# Altium PCB Nguon.PcbDoc
Units mil, origin at the board's own origin, x right, y up, seen from the top; angles counter-clockwise.
Board outline 3720 x 1285 mil, 2 copper layers (Top Layer, Bottom Layer); 7 components, 6 nets, 17 pads, 0 vias.
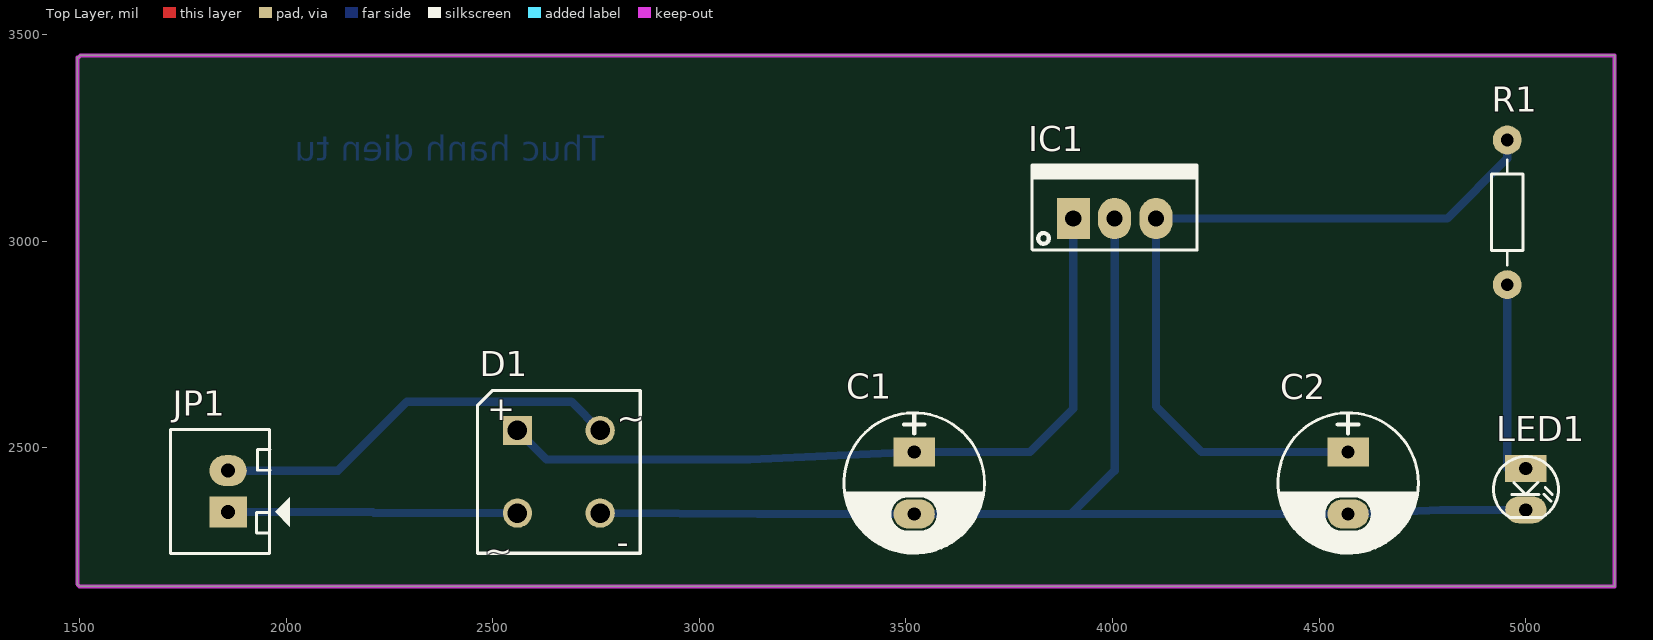
[diagram p0: Top Layer view]
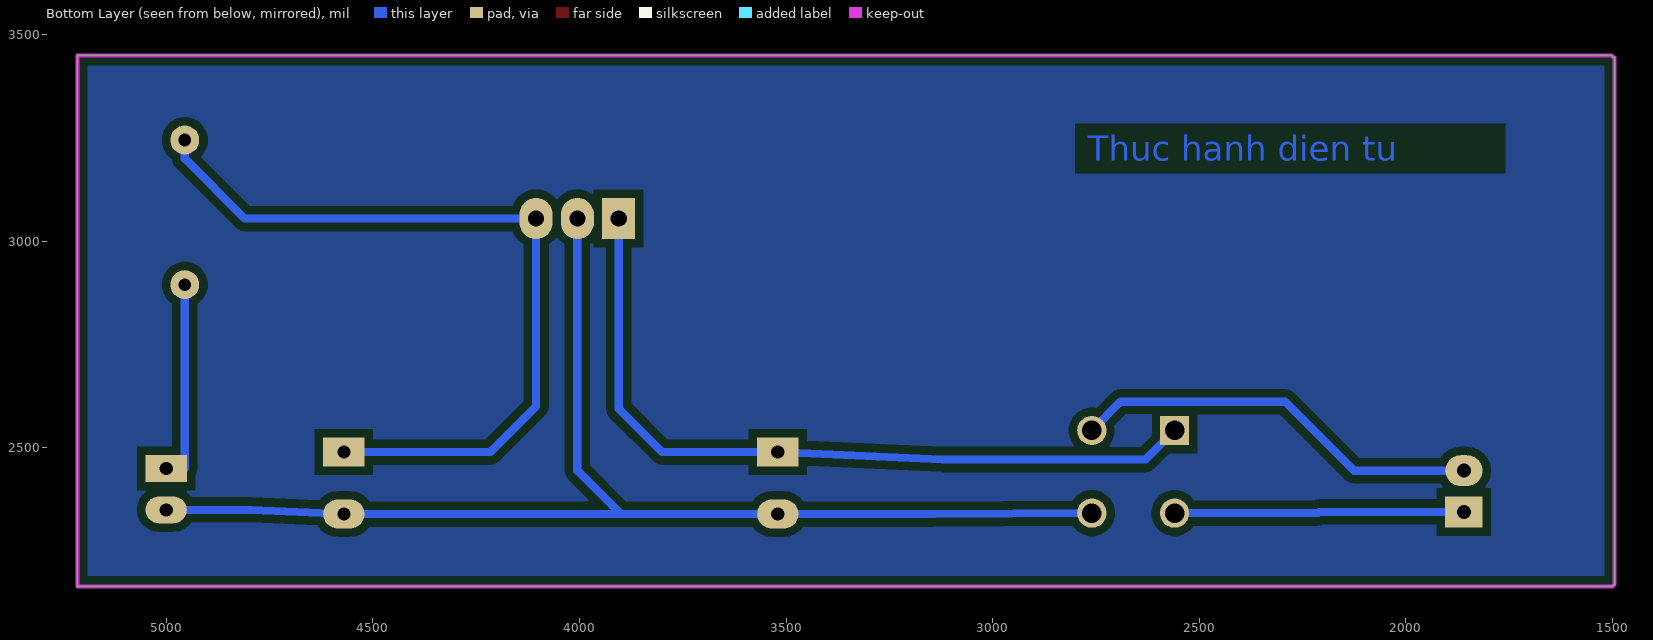
[diagram p1: Bottom Layer view, seen from below]
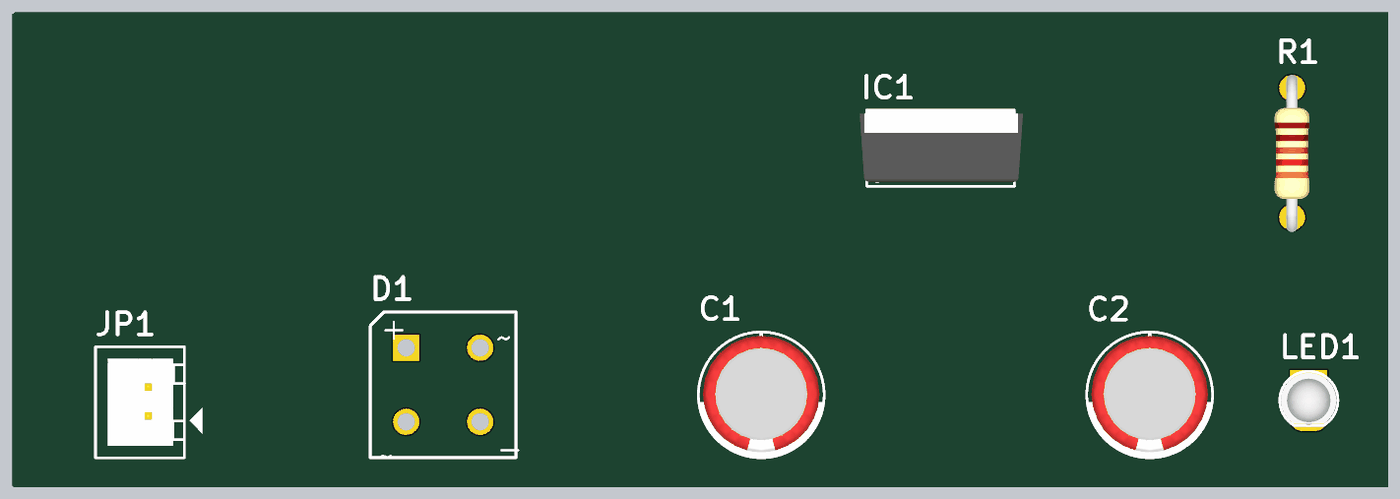
[diagram p2: 3D render of the assembled board from above, using the file's embedded part models]

## Layer stack, top to bottom
Top Solder: solder mask 0.4, Solder Resist, Dk 3.5
Top Layer: signal copper 1.4
Dielectric 1: dielectric 12.6, FR-4, Dk 4.8
Bottom Layer: signal copper 1.4
Bottom Solder: solder mask 0.4, Solder Resist, Dk 3.5

## Board outline
1500,2165 1495,2170 1495,3445 1497.5,3445 1502.5,3450 5215,3450 5215,2165

## Design rules (kind name [scope] priority, off if disabled: settings)
Clearance [All] p1: gap=20 ignorepadtopadclearanceinfootprint=FALSE
PolygonConnect [All] p1: connectstyle=Relief reliefconductorwidth=10 reliefentries=4 polygonreliefangle="90 Angle" airgapwidth=10
RoomDefinition nguon [InComponentClass('nguon')] p1: confinementstyle=ConfineIn formatcopy=TRUE lockcomponents=FALSE outline 7075,1435 9325,1435 9325,1990 7075,1990
RoutingLayers [All] p1: top layer_v5=FALSE bottom layer_v5=TRUE
RoutingVias [All] p1: holewidth=28 width=50 viastyle="Through Hole" minholewidth=28 minwidth=50 maxholewidth=28 maxwidth=50
SolderMaskExpansion [All] p1: expansion=4 istentingtop=FALSE
Width [All] p1: maxlimit=30 minlimit=15 preferedwidth=20
29 further rules are at their usual default settings.

## Components (designator, comment, footprint, x,y, rotation, side; value= is the part's Value field where it differs from the comment)
C1 "1000uF/16V" CP1.5/3.4 3520,2490 r270 top
C2 "470uF/16V" CP1.5/3.4 4570,2490 r270 top value=1000uF/16V
D1 "Bridge1" D-38 2660,2442.29 r0 top
IC1 "LM7812" QTO-220 3905,3055 r0 top value=LM7805
JP1 "Header 2" CON2 1860,2345 r90 top
LED1 "LED" LED-3 5000,2450 r270 top value="LED 3 ly Single Colour"
R1 "1k" R1/4W 4955,2895 r90 top value="R1/4W - 1K"

## Footprints (in the part's own frame and the unit in brackets; to place one, negate y for a bottom-side part, rotate by r counter-clockwise, add the part's x,y. Pads: shape width x height; smd on the part's side, far side on the other; paste and mask are expansions set on the pad)
CON2 [mil] "CON2"
  rect 75x90 hole 34: 1(0,0)
  oval 75x90 hole 34: 2(100,0)
  silkscreen extent -100,-150 200,140, body extent -68,-70 168,107, height 236
CP1.5/3.4 [mil] "Tu hoa 220->470uF,16V, 470uF/16V,25V"
  rect 70x100 hole 32: 1(0,0)
  oval 70x100 hole 32: 2(150,0)
  silkscreen extent -95,-170 245,170, body extent -85,-157 230,157, height 446
D-38 [mm] "Bridge Rectifier; 4 Terminals; Body 9.4 x 9.4 mm (typ); Pitch 5.08 mm"
  rect 1.8x1.8 hole 1.2: 1(-2.54,2.54)
  round 1.8 hole 1.2: 2(-2.54,-2.54) 3(2.54,-2.54) 4(2.54,2.54)
  silkscreen extent -5,-5 5,5, body extent -5,-5 5,5, height 9.91
LED-3 [mil] "LED 2 PIN, 3ly Only colour"
  rect 65x100 hole 32: 1(0,0)
  oval 65x100 hole 32: 2(100,0)
  silkscreen extent -29,-78 118,79, body extent -25,-75 113,75, height 217
QTO-220 [mil] "TO-220 - 1-2-3"
  rect 80x100 hole 39: 1(0,0)
  oval 80x100 hole 39: 2(100,0) 3(200,0)
  silkscreen extent -100,-76 300,130, body extent -119,-64 322,121, height 755
R1/4W [mil] "R 1/4W, 2 Pin, 350mil"
  round 70 hole 31: 1(0,0) 2(350,0)
  silkscreen extent 48,-38 302,38, body extent -40,-47 386,47, height 111

## Part data
C1 C2: library part CP4, "Cap 1000uF/16V - 220uF/50V", Description 1="2200uF-3300uF/6,3V - 1000uF-2200uF/10V", Description 2="1000uF/16V - 470uF => 1000uF/25V - 100uF/100V", Description 3=330uF>470uF/35V_220uF>470uF/50V_10uF>22uF/250V, Description 4="220uF => 330uF/63V - 10uF =>33uF/160 - 200V", Description 5="4,7uF>10uF/250V_3,3uF>10uF/400V - 2,2uF>4,7uF/450V"
D1: "Full Wave Diode Bridge", DatasheetVersion=E2732B, LatestRevisionDate=29-May-2009, LatestRevisionNote="Sch pins A & K swapped.", PackageDescription="Bridge Rectifier; 4 Terminals; Body 9.4 x 9.4 mm (typ); Pitch 5.08 mm", PackageReference=D-38, Published=8-Jun-2000, Publisher="Altium Limited"
IC1: library part LM78xx, "On ap +, from + 5 to + 24VDC"
JP1: "Header, 2-Pin", Manufacturer="Generic Components", Class=Connector
LED1: "LED Single colour Green and Red"
R1: library part R1/4W, "Resistor 1/4W"

## Nets (pads, with @x,y where several pads share a name; then routed paths per layer and width w, separated by ;. In a path a pad name is that pad's centre, name@x,y a point inside that pad or via, vN(x,y) a via of type N, cw(c..) or ccw(c..) an arc to the next point about the centre after c; other vN are vias at no path point)
+12: C2.1 IC1.3 R1.2 | length 1920.6
  Bottom Layer w20: C2.1 4215,2490 4105,2600 IC1.3 4810,3055 4955,3200 R1.2
GND: C1.2 C2.2 D1.3 IC1.2 LED1.2 | length 2998.7
  Bottom Layer w20: D1.3 3142.29,2340 C1.2 3900,2340 ; IC1.2 4005,2445 3900,2340 ; LED1.2 4795,2350 C2.2 3900,2340
NetC1_1: C1.1 D1.1 IC1.1 | length 1878
  Bottom Layer w20: D1.1 2630.29,2472 3122,2472 C1.1 3800,2490 3905,2595 IC1.1
NetD1_2: D1.2 JP1.1 | length 701.1
  Bottom Layer w20: JP1.1 2210,2345 2212.71,2342.29 D1.2
NetD1_4: D1.4 JP1.2 | length 998
  Bottom Layer w20: JP1.2 2126,2445 2293,2612 2690.29,2612 D1.4
NetLED1_1: LED1.1 R1.1 | length 490
  Bottom Layer w20: R1.1 4955,2450 LED1.1

## Polygon pours and split planes (outlines as drawn)
no net on Bottom Layer "NONET_L02_P001" (solid, pour order 1): 1500,3450 5215,3450 5215,2165 1495,2165

## Keep-outs
Keep-Out Layer:
  the board outline again, w10

## Other copper
Bottom Layer:
  text "Thuc hanh dien tu" at 2770,3195 h60

## Text inside footprints (layer, text, board x,y; h text height)
D1: Top Overlay "+" at 2486.38,2566.85 h59.06; Top Overlay "-" at 2800,2242.29 h59.05; Top Overlay "~" at 2480,2222.29 h59.05; Top Overlay "~" at 2800,2542.29 h59.05